# EAGLE board Esp32-S3mini_can_brd_NEW (EAGLE 9.7.0)
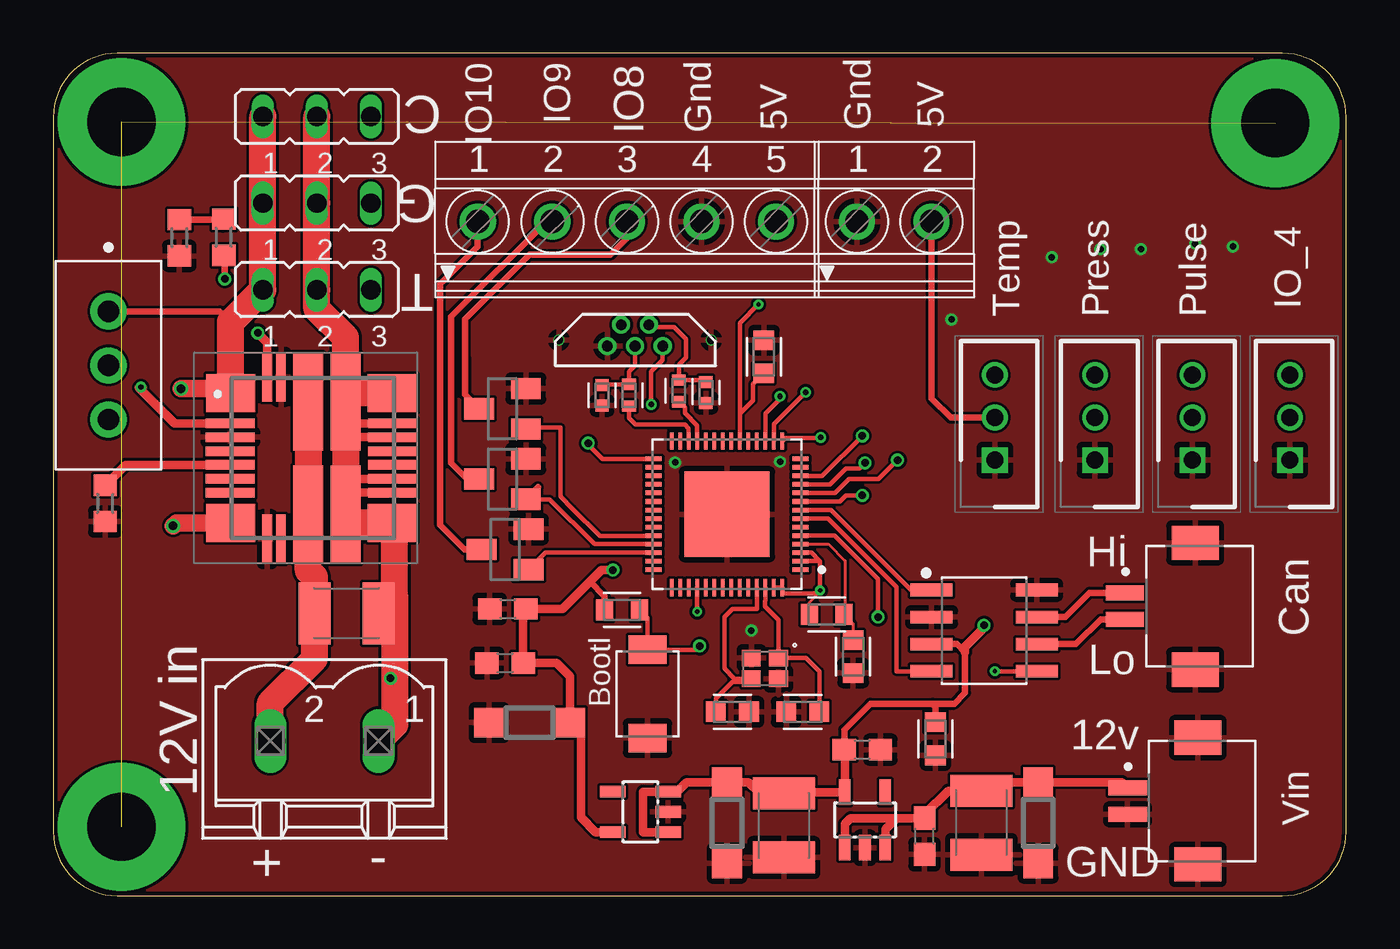
[diagram p0: board, top side]
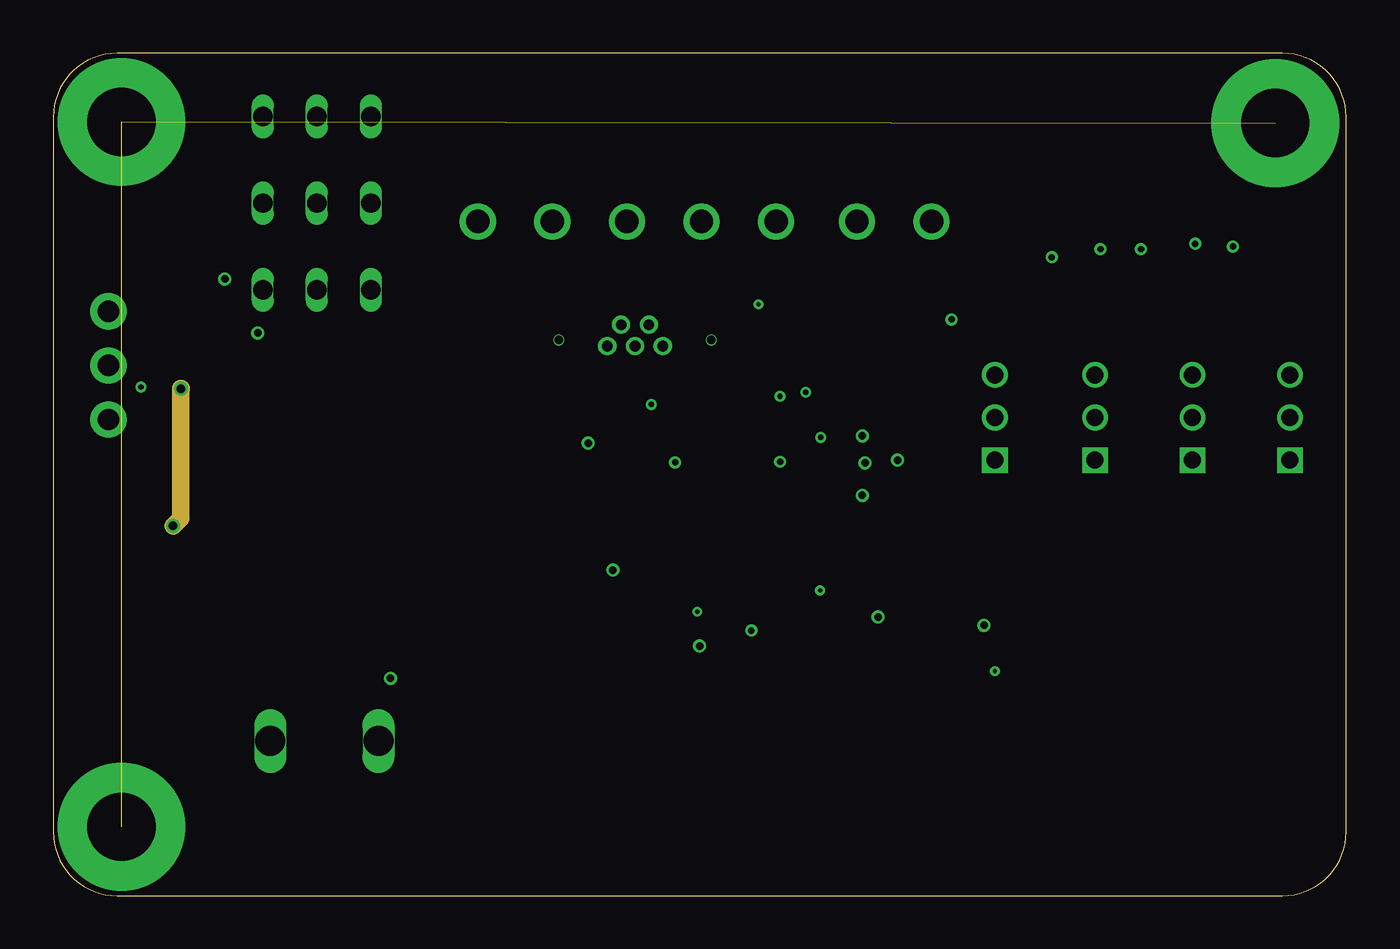
[diagram p1: board, inner layer Route2]
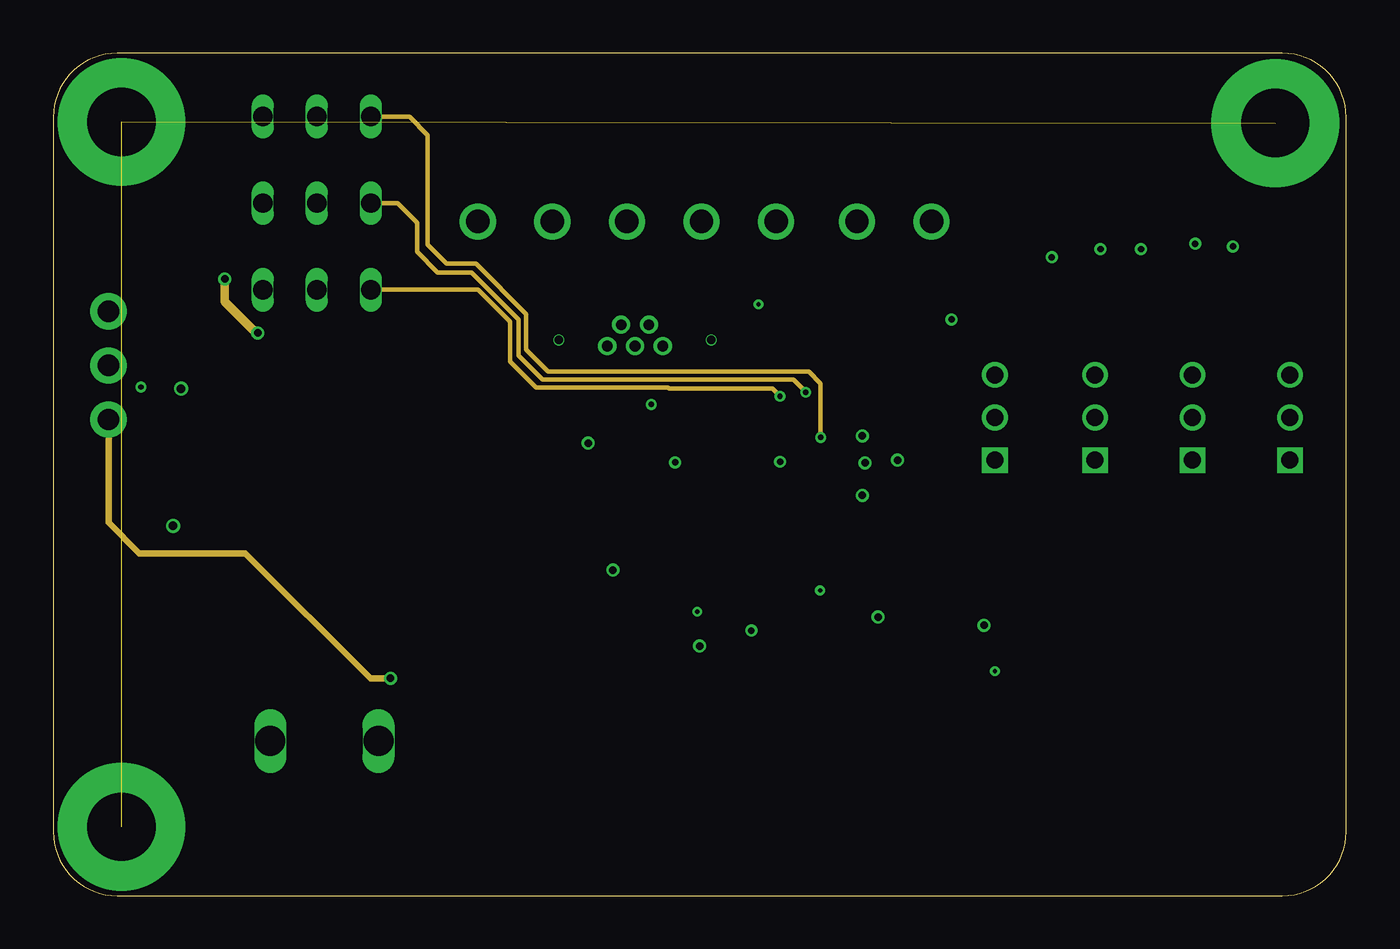
[diagram p2: board, inner layer Route15]
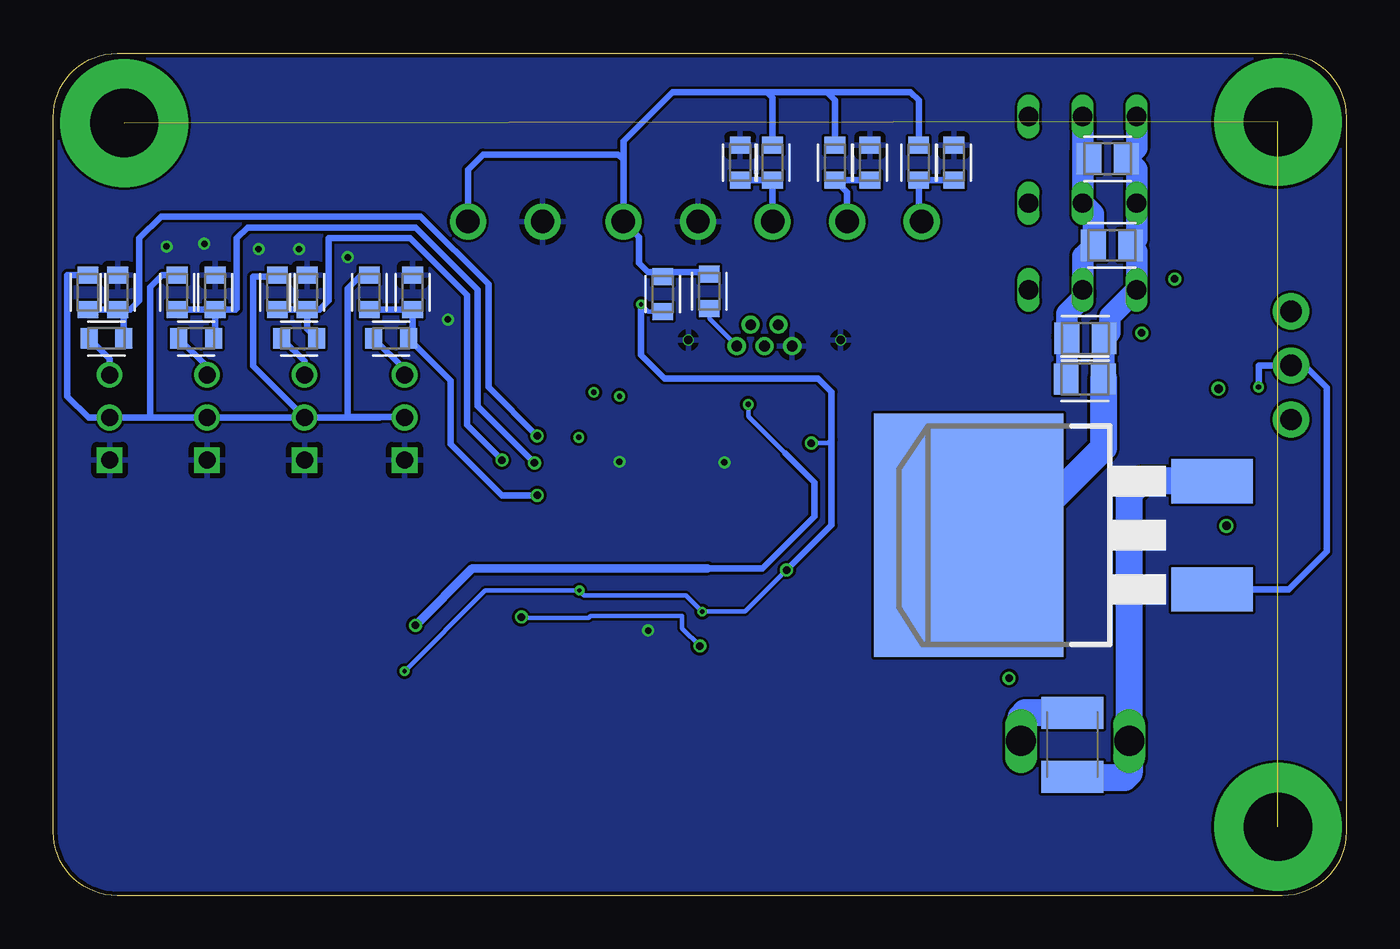
[diagram p3: board, bottom side, seen from below]

Size 60.69 x 39.55 mm. Coordinates in mm from the lower left corner, seen from the top.
Outline: 57.69,39.55 3,39.55 arc90 0,36.55 0,3 arc90 3,0 57.69,0 arc90 60.69,3 60.69,36.55 arc90 57.69,39.55
Copper layers (1+2*15+16): Top 0.035mm / dielectric 0.2mm / Route2 0.0175mm / dielectric 1.065mm / Route15 0.0175mm / dielectric 0.2mm / Bottom 0.035mm
Design rules "jlcpcb-4layers.dru *": minimum track width 3.5mil, minimum drill 0.2mm, track to track 5mil, track to pad 0.2mm, pad to pad 5mil, via to via 0.5mm, smd to smd 5mil, copper to edge 0.2mm, drill to drill 6mil, minimum pad ring 0.054mm, minimum via ring 0.13mm, stop-mask expansion 0.05mm, vias tented up to drill 16mil, thermal gap 10mil

## Footprints (pad centres in the part's own frame; a part is rotated, then mirrored left to right if it is on the bottom)
CAPC1608X85 = smd 0.921 x 0.97: 1 -0.775,0; 2 0.775,0
CAPC1005X60 = smd 0.56 x 0.629: 1 -0.485,0; 2 0.485,0
C0603 = smd 1.1 x 1: 1 -0.85,0; 2 0.85,0
CAPC2012X110 = smd 1.165 x 1.465: 1 -0.875,0; 2 0.875,0
C1210K = smd 1.5 x 2.9: 1 -1.5,0; 2 1.5,0
SOD123 = smd 1.4 x 1.4: A 1.9,0; C -1.9,0
TPSM84624MOLR = smd 2.3 x 1.8: 1 -3.8,3.05; 8 -3.8,-3.05; 13 3.8,-3.05; 20 3.8,3.05 | smd 2.3 x 0.45: 2 -3.808,1.625; 3 -3.808,0.975; 4 -3.808,0.325; 5 -3.808,-0.325; 6 -3.808,-0.975; 7 -3.808,-1.625; 14 3.808,-1.625; 15 3.808,-0.975; 16 3.808,-0.325; 17 3.808,0.325; 18 3.808,0.975; 19 3.808,1.625 | smd 0.45 x 2.3: 9 -2.075,-3.808; 10 -1.425,-3.808; 23 -1.425,3.808; 24 -2.075,3.808 | smd 1.4 x 4.6: 11 -0.15,-2.658; 12 1.6,-2.658; 21 1.6,2.658; 22 -0.15,2.658
SOIC127P599X175-8 = smd 1.967 x 0.599: 1 -2.469,1.905; 2 -2.469,0.635; 3 -2.469,-0.635; 4 -2.469,-1.905; 5 2.469,-1.905; 6 2.469,-0.635; 7 2.469,0.635; 8 2.469,1.905
D2PACK = smd 2.083 x 3.81: 1 -2.54,-8.89; 3 2.54,-8.89 | smd 11.43 x 8.89: 2 0,2.54
HRS_DF13A-2P-1.25H(51) = smd 0.7 x 1.8: 1 -0.625,-3.3; 2 0.625,-3.3 | smd 1.6 x 2.2: S1 -2.975,0; S2 2.975,0
SHDR3W60P0X200_1X3_780X360X680 = drill 0.8 pad 1.2 square: 1 0,0 | drill 0.8 pad 1.2: 2 -2,0; 3 -4,0
JP2 = drill 0.914 long: 1 -2.54,0; 2 0,0; 3 2.54,0
RESC1608X60 = smd 0.799 x 0.974: 1 -0.815,0; 2 0.815,0
SOT23 = smd 1 x 1.4: 1 -0.95,-1.1; 2 0.95,-1.1; 3 0,1.1
R0603 = smd 1 x 1.1: 1 -0.85,0; 2 0.85,0
PV36W = drill 1 pad 1.7: 1 0,0; 2 2.54,0; 3 5.08,0
RESC1005X40 = smd 0.535 x 0.644: 1 -0.507,0; 2 0.507,0
SOT23-5 = smd 0.55 x 1.2: 1 -0.95,-1.3; 2 0,-1.3; 3 0.95,-1.3; 4 0.95,1.3; 5 -0.95,1.3
SW_TS-1088-AR02016 = smd 1.35 x 1.8: 1 -2.075,0; 2 2.075,0
QFN40P700X700X90-57N = smd 0.81 x 0.22: 1 -3.445,2.6; 2 -3.445,2.2; 3 -3.445,1.8; 4 -3.445,1.4; 5 -3.445,1; 6 -3.445,0.6; 7 -3.445,0.2; 8 -3.445,-0.2; 9 -3.445,-0.6; 10 -3.445,-1; 11 -3.445,-1.4; 12 -3.445,-1.8; 13 -3.445,-2.2; 14 -3.445,-2.6; 29 3.445,-2.6; 30 3.445,-2.2; 31 3.445,-1.8; 32 3.445,-1.4; 33 3.445,-1; 34 3.445,-0.6; 35 3.445,-0.2; 36 3.445,0.2; 37 3.445,0.6; 38 3.445,1; 39 3.445,1.4; 40 3.445,1.8; 41 3.445,2.2; 42 3.445,2.6 | smd 0.22 x 0.81: 15 -2.6,-3.445; 16 -2.2,-3.445; 17 -1.8,-3.445; 18 -1.4,-3.445; 19 -1,-3.445; 20 -0.6,-3.445; 21 -0.2,-3.445; 22 0.2,-3.445; 23 0.6,-3.445; 24 1,-3.445; 25 1.4,-3.445; 26 1.8,-3.445; 27 2.2,-3.445; 28 2.6,-3.445; 43 2.6,3.445; 44 2.2,3.445; 45 1.8,3.445; 46 1.4,3.445; 47 1,3.445; 48 0.6,3.445; 49 0.2,3.445; 50 -0.2,3.445; 51 -0.6,3.445; 52 -1,3.445; 53 -1.4,3.445; 54 -1.8,3.445; 55 -2.2,3.445; 56 -2.6,3.445 | smd 4 x 4: 57 0,0
PCMB20AUETR = drill 0.5 pad 0.85: P$1 -1.3,0.28; P$2 -0.65,-0.72; P$3 0,0.28; P$4 0.65,-0.72; P$5 1.3,0.28 | drill 0.4 slot 1.1 rotated 90: SH@1 -3.575,0; SH@2 3.575,0
1751277 = drill 1.1 pad 1.7: 1 -7,-0.1; 2 -3.5,-0.1; 3 0,-0.1; 4 3.5,-0.1; 5 7,-0.1
1751248 = drill 1.1 pad 1.7: 1 -1.75,-0.1; 2 1.75,-0.1
MSTBV2 = drill 1.397 long: 1 -2.54,0; 2 2.54,0
WE-XTAL_IQXC-42 = smd 0.875 x 0.775: 1 -0.637,-0.487; 2 0.637,-0.487; 3 0.637,0.487; 4 -0.637,0.487

## Placement (x,y rotation side)
C1  [CAPC1608X85]  35.18,8.64 0 top
C2  [CAPC1608X85]  31.88,8.64 180 top
C3  [CAPC1608X85]  41.4,7.37 90 top
C4  [CAPC1608X85]  33.35,25.3 270 top
C5  [CAPC1005X60]  30.63,23.62 90 top
C5V_B  100n  [C0603]  37.97,6.86 180 top
C6  [CAPC1005X60]  25.76,23.5 90 top
C7  1µ  [CAPC1608X85]  37.54,11.23 270 top
C8  [CAPC2012X110]  11.2,34.59 0 bottom
C9  [CAPC2012X110]  12.27,24.26 0 bottom
C10  [CAPC2012X110]  12.24,26.16 0 bottom
C11  [CAPC2012X110]  11,30.53 0 bottom
C_5V_S  22u  [C1210K]  34.29,3.3 90 top
C_IN  22u  [C1210K]  43.56,3.43 90 top
C_IN1  22u  [C1210K]  13.77,13.26 180 top
C_IN2  22u  [C1210K]  12.85,7.09 270 bottom
C_IN_S  10n  [C0603]  40.89,2.79 90 top
C_IN_S1  10u  [C0603]  21.21,10.92 0 top
C_IN_S2  100n  [C0603]  21.34,13.46 0 top
D1  5.5v  [SOD123]  46.23,3.43 270 top
D2  16V  [SOD123]  31.62,3.43 270 top
D3  3.6v  [SOD123]  22.35,8.13 180 top
I2C  TPSM84824MOLR  [TPSM84624MOLR]  12.12,20.55 0 top
IC1  MCP2551  [SOIC127P599X175-8]  43.69,12.45 0 top
IC3  LM317BD2T  [D2PACK]  15.19,16.92 90 bottom
J1  DF13A-2P-1.25H(51)  [HRS_DF13A-2P-1.25H(51)]  53.59,13.59 270 top
J2  292161-3  [SHDR3W60P0X200_1X3_780X360X680]  44.2,20.45 270 top
J3  DF13A-2P-1.25H(51)  [HRS_DF13A-2P-1.25H(51)]  53.72,4.45 270 top
J4  292161-3  [SHDR3W60P0X200_1X3_780X360X680]  48.89,20.45 270 top
J5  292161-3  [SHDR3W60P0X200_1X3_780X360X680]  53.47,20.45 270 top
J6  292161-3  [SHDR3W60P0X200_1X3_780X360X680]  58.04,20.45 270 top
JP1  [JP2]  12.37,36.58 0 top
JP2  [JP2]  12.37,32.51 0 top
JP3  [JP2]  12.37,28.45 0 top
PD4  [RESC1608X60]  57.66,28.32 270 bottom
PD5  [RESC1608X60]  53.09,28.32 270 bottom
PD6  [RESC1608X60]  48.77,28.32 270 bottom
PD7  [RESC1608X60]  43.81,28.32 270 bottom
PU1  10k  [RESC1608X60]  36.3,13.21 180 top
PU2  10k  [RESC1608X60]  26.7,13.41 0 top
PU4  [RESC1608X60]  59.06,28.32 270 bottom
PU5  [RESC1608X60]  54.86,28.32 270 bottom
PU6  [RESC1608X60]  50.17,28.32 270 bottom
PU7  [RESC1608X60]  45.85,28.32 270 bottom
Q1  NMOSFET  [SOT23]  21.08,19.56 90 top
Q2  NMOSFET  [SOT23]  21.21,16.26 90 top
Q4  NMOSFET  [SOT23]  21.08,22.86 90 top
R1  [RESC1608X60]  29.9,28.37 90 bottom
R2  [RESC1608X60]  32.08,28.24 90 bottom
R3  [RESC1608X60]  28.45,34.42 270 bottom
R4  [RESC1608X60]  26.92,34.42 270 bottom
R5  [RESC1608X60]  22.35,34.42 270 bottom
R6  [RESC1608X60]  24,34.42 270 bottom
R7  [RESC1608X60]  18.41,34.42 270 bottom
R8  [RESC1608X60]  20.07,34.42 270 bottom
R9  [R0603]  8,30.91 270 top
R10  [R0603]  5.92,30.89 90 top
R11  [R0603]  2.44,18.41 90 top
R12  [PV36W]  2.59,27.43 270 top
R20  22  [RESC1005X40]  27.03,23.5 90 top
R21  22  [RESC1005X40]  29.36,23.7 90 top
R_3V3  3v3  [SOT23-5]  27.56,3.94 90 top
R_5V  5V  [SOT23-5]  38.1,3.56 0 top
RS4  [RESC1608X60]  58.19,26.16 180 bottom
RS5  [RESC1608X60]  53.97,26.16 180 bottom
RS6  [RESC1608X60]  49.15,26.16 180 bottom
RS7  [RESC1608X60]  44.83,26.16 180 bottom
S1  TS-1088-AR02016  [SW_TS-1088-AR02016]  27.89,9.47 270 top
U1  ESP32-S3R8  [QFN40P700X700X90-57N]  31.62,17.91 180 top
U$8  PCMB20AUETR  [PCMB20AUETR]  27.3,26.09 180 top
X1  1751277  [1751277]  26.92,31.75 0 top
X2  1751248  [1751248]  39.47,31.75 0 top
X3  MSTBV2  [MSTBV2]  12.73,7.26 180 top
Y1  40MHz  [WE-XTAL_IQXC-42]  33.4,10.67 180 top

## Library data of the parts
C1-C4 C7 = Capacitor; CATEGORY: Capacitor; PACKAGE_SIZE: 0603; PACKAGE_TYPE: Surface Mount; SUBCATEGORY: Ceramic Capacitors; TYPE: MLCC
C5 C6 = Capacitor; CATEGORY: Capacitor; PACKAGE_SIZE: 0402; PACKAGE_TYPE: Surface Mount; SUBCATEGORY: Ceramic Capacitors; TYPE: MLCC
C5V_B C_5V_S C_IN C_IN1 C_IN2 C_IN_S C_IN_S1 C_IN_S2 = rcl; SPICEPREFIX: C
C8-C11 = Capacitor; CATEGORY: Capacitor; PACKAGE_SIZE: 0805; PACKAGE_TYPE: Surface Mount; SUBCATEGORY: Ceramic Capacitors; TYPE: MLCC
D1-D3 = diode
I2C = TPSM84824MOLR; ARROW_PART_NUMBER: TPSM84824MOLR; ARROW_PRICE-STOCK: https://www.arrow.com/en/products/tpsm84824molr/texas-instruments?region=nac; DESCRIPTION: 4.5V to 17V Input, 0.6V-10V Output, 8A Power Module in Compact 7.5x7.5mm Footprint; HEIGHT: 5mm; MANUFACTURER_NAME: Texas Instruments; MANUFACTURER_PART_NUMBER: TPSM84824MOLR; MOUSER_PART_NUMBER: 595-TPSM84824MOLR; MOUSER_PRICE-STOCK: https://www.mouser.co.uk/ProductDetail/Texas-Instruments/TPSM84824MOLR?qs=W0yvOO0ixfEo%2FgpT5Em6eQ%3D%3D
IC1 = IC_Interface; CATEGORY: IC_Interface; MANUFACTURER: Microchip; MPN: MCP2551-E/SN; OPERATING_TEMP: -40 to +125 °C; PART_STATUS: Active; SUB-CATEGORY: Transceiver
IC3 = v-reg
J1 J3 = DF13A-2P-1.25H_51_; AVAILABILITY: In Stock; CHECK_PRICES: https://www.snapeda.com/parts/DF13A-2P-1.25H(51)/Hirose+Electric+Co+Ltd/view-part/?ref=eda; DESCRIPTION: Connector Header Surface Mount, Right Angle 2 position 0.049 (1.25mm); MF: Hirose Electric Co Ltd; MP: DF13A-2P-1.25H(51); PACKAGE: None; PRICE: None; PURCHASE-URL: https://www.snapeda.com/api/url_track_click_mouser/?unipart_id=4701063&manufacturer=Hirose Electric Co Ltd&part_name=DF13A-2P-1.25H(51)&search_term=None; SNAPEDA_LINK: https://www.snapeda.com/parts/DF13A-2P-1.25H(51)/Hirose+Electric+Co+Ltd/view-part/?ref=snap
J2 J4-J6 = TE 292161-3; ARROW_PART_NUMBER: 292161-3; ARROW_PRICE-STOCK: https://www.arrow.com/en/products/292161-3/te-connectivity?region=europe; DESCRIPTION: AMP - TE CONNECTIVITY - 292161-3 - HEADER, VERTICAL, 3WAY; HEIGHT: 6.8mm; MANUFACTURER_NAME: TE Connectivity; MANUFACTURER_PART_NUMBER: 292161-3; MOUSER_PART_NUMBER: 571-292161-3; MOUSER_PRICE-STOCK: https://www.mouser.co.uk/ProductDetail/TE-Connectivity/292161-3?qs=VKrXD49J9Epm0cTL0dEucA%3D%3D
JP1-JP3 = jumper
PD4-PD7 PU1 PU2 PU4-PU7 R1-R8 R20 R21 RS4-RS7 = Resistor; CATEGORY: Resistor; SUB-CATEGORY: Fixed
Q1 Q2 Q4 = Transistor; CATEGORY: Transistor; SUB-CATEGORY: MOSFET; TYPE: N-Channel
R9-R11 = MP930_res
R12 = Resistor; CATEGORY: Potentiometers; DATASHEET: https://www.bourns.com/docs/Product-Datasheets/pv36.pdf; DESCRIPTION: 0.5W 1/2W PC Pins Through Hole Trimmer Potentiometer Cermet 25.0 Turn Top Adjustment; MANUFACTURER: Bourns Inc.; MPN: PV36Wx; OPERATING_TEMPERATURE: -55°C ~ 125°C; PACKAGE_SIZE: NA; PACKAGE_TYPE: Through Hole; PART_STATUS: Active; ROHS: Compliant; SERIES: PV36; SUBCATEGORY: Trimmer Potentiometers; TEMPERATURE_COEFFICIENT: ±100ppm/°C; THERMALLOSS: 0.5 W; TOLERANCE: ±10%; TYPE: Top Adjustment Inline Leads
R_3V3 R_5V = v-reg-micrel; OC_FARNELL: unknown; OC_NEWARK: unknown
S1 = JLC PCB Basic Parts_loc; AVAILABILITY: Not in stock; CHECK_PRICES: https://www.snapeda.com/parts/TS-1088-AR02016/Xunpu/view-part/?ref=eda; DESCRIPTION: 50mA 4mm 100MΩ 100,000 Times 12V 160gf 3mm 2mm Round Button Vertical welding SPST SMD Tactile Switches ROHS; MF: Xunpu; MP: TS-1088-AR02016; PACKAGE: Package; PRICE: None; SNAPEDA_LINK: https://www.snapeda.com/parts/TS-1088-AR02016/Xunpu/view-part/?ref=snap
U1 = JLC PCB Basic Parts_loc; AVAILABILITY: In Stock; CHECK_PRICES: https://www.snapeda.com/parts/ESP32-S3R8/Espressif+Systems/view-part/?ref=eda; DESCRIPTION: IC RF TxRx + MCU Bluetooth, WiFi 802.11b/g/n, Bluetooth v5.0 2.412GHz ~ 2.484GHz 56-VFQFN Exposed Pad; MF: Espressif Systems; MP: ESP32-S3R8; PACKAGE: None; PRICE: None; SNAPEDA_LINK: https://www.snapeda.com/parts/ESP32-S3R8/Espressif+Systems/view-part/?ref=snap
U$8 = Library
X1 X2 = con-phoenix-350; OC_FARNELL: unknown; OC_NEWARK: unknown
X3 = Most_used_libr; MPN: MSTBV 2,5/2-GF-5.08; OC_FARNELL: 1792792; OC_NEWARK: 69R9845
Y1 = Wurth_Quartz Crystals &amp; Oscillators_WE-XTAL; C-LOAD: 10pF; DATASHEET-URL: https://www.we-online.com/catalog/datasheet/830059585.pdf; MOUNT: SMT; PART-NUMBER: 830059585; STABILITY: 20ppm; TOLERANCE: ±15ppm

## Nets
5_3V: J2.2 J4.2 J5.2 J6.2 PU4.1 PU5.1 PU6.1 PU7.1 R1.2 R2.2 R4.1 R6.1 R8.1 X1.5 X2.2
+3V3: C4.2 C_IN_S1.2 C_IN_S2.2 D3.C IC1.5 PU1.2 PU2.1 R2.1 R_3V3.5 U1.2 U1.3 U1.20 U1.29 U1.46 U1.55 U1.56
+5V: C3.2 C5V_B.2 C_5V_S.2 D2.C IC1.3 R1.1 R_3V3.1 R_3V3.3 R_5V.5 U$8.P$1
+7V: C8.2 C9.2 C10.2 C11.2 I2C.1 I2C.8 IC3.2 JP1.1 JP2.1 JP3.1 R12.1
+12V: C_IN1.2 C_IN2.2 I2C.11 I2C.22 IC3.3 X3.2
BLUE: Q1.3 R5.2 R6.2 X1.2
BOOT: PU2.2 S1.1 U1.5
CAN_HI: IC1.7 J1.1
CAN_LO: IC1.6 J1.2
CHOKE: JP3.3 U1.17
DGND: C8.1 C9.1 C10.1 C11.1 C_IN1.1 C_IN2.1 I2C.12 I2C.13 I2C.14 I2C.15 I2C.18 I2C.19 I2C.20 I2C.21 JP1.2 JP2.2 JP3.2 R12.3 X3.1
DRV_B: Q1.1 U1.39
DRV_G: Q4.1 U1.38
DRV_R: Q2.1 U1.40
GEAR: JP2.3 U1.16
GND: C1.1 C2.1 C3.1 C4.1 C5.1 C5V_B.1 C6.1 C7.2 C_5V_S.1 C_IN.1 C_IN_S1.1 C_IN_S2.1 C_IN_S.1 D1.A D2.A D3.A I2C.3 I2C.9 I2C.23 IC1.2 IC1.8 J1.S1 J1.S2 J2.1 J3.2 J3.S1 J3.S2 J4.1 J5.1 J6.1 PD4.1 PD5.1 PD6.1 PD7.1 Q1.2 Q2.2 Q4.2 R3.1 R5.1 R7.1 R10.1 R11.1 R_3V3.2 R_5V.2 S1.2 U1.57 U$8.P$5 U$8.SH@1 U$8.SH@2 X1.4 X2.1 Y1.2 Y1.4
GREEN: Q4.3 R3.2 R4.2 X1.3
IO4: PD4.2 PU4.2 RS4.1 U1.12
IO5: PD5.2 PU5.2 RS5.1 U1.11
IO6: PD6.2 PU6.2 RS6.1 U1.10
IO7: PD7.2 PU7.2 RS7.1 U1.9
N$3: C1.2 U1.54 Y1.1
N$4: C2.2 U1.53 Y1.3
N$6: I2C.24 R9.2
N$7: C7.1 PU1.1 U1.4
N$8: J6.3 RS4.2
N$9: R9.1 R10.2
N$10: C6.2 R20.2 U$8.P$3
N$11: C5.2 R21.2 U$8.P$2
N$12: J4.3 RS6.2
N$13: J5.3 RS5.2
N$14: J2.3 RS7.2
N$15: I2C.2 IC3.1 R12.2
N$16: I2C.5 R11.2
RED: Q2.3 R7.2 R8.2 X1.1
RXD: IC1.4 U1.7
THROTTLE: JP1.3 U1.15
TXD: IC1.1 U1.8
USB_D+: R20.1 U1.26
USB_D-: R21.1 U1.25
VIN: C_IN.2 C_IN_S.2 D1.C J3.1 R_5V.1 R_5V.3

## Tracks (layer width: path | path; a pad name or v marks a point on that pad's centre or on a via)
5_3V
  Top 0.305: X2.2 41.22,23.34 42.12,22.45 J2.2
  Bottom 0.203: R2.2 31.93,29.21 31.93,29.26
  Bottom 0.305: 33.92,34.54 X1.5 33.2,30.92 33.2,29.7 32.77,29.26 31.93,29.26 29.97,29.26 R1.2 | 33.92,34.54 33.92,35.42 31.62,37.72 27.18,37.72 | 27.18,37.72 26.92,37.47 R4.1 | 27.18,37.72 24.38,37.72 | 24.38,37.72 24,37.34 R6.1 | 24.38,37.72 20.45,37.72 20.07,37.34 R8.1 | X2.2 41.22,34.09 40.51,34.8 34.18,34.8 33.92,34.54 | J4.2 51.31,24.86 51.31,29.06 50.24,29.06 PU6.1 | PU5.1 55.57,29.14 56.13,28.57 56.13,22.48 56.1,22.45 | PU4.1 60.02,29.14 60.02,23.44 59.02,22.45 J6.2 56.1,22.45 | J2.2 44.23,22.48 45.94,22.48 45.97,22.45 | PU7.1 46.23,29.14 46.86,28.5 46.86,22.48 45.34,22.48 45.37,22.45 45.97,22.45 | J4.2 45.97,22.45 | J4.2 J5.2 56.1,22.45
+3V3  (via drill 0.2, 0.35)
  Top 0.152: PU1.2 35.48,13.76 35.99,14.28
  Top 0.2: 32.22,21.43 U1.20 32.22,22.63 | U1.46 v30.22,13.34 v30.23,13.34 | U1.55 U1.56 34.22,14.2 35.92,14.2 35.99,14.28 v35.99,14.33 35.99,15.7 35.97,15.72 | 35.97,15.72 35.08,15.72 U1.2 | U1.3 35.58,16.11 35.97,15.72 | v44.2,10.54 IC1.5 | 32.22,22.63 32.22,26.89 v33.1,27.76 | C4.2 32.84,24.02 32.84,23.25 32.22,22.63
  Top 0.203: U1.29 25.77,20.51 25.07,21.21 v25.11,21.25
  Top 0.305: PU2.1 25.88,14.05 25.18,14.74
  Top 0.406: R_3V3.5 25.46,2.99 24.77,3.68 24.77,7.62 D3.C 24.25,10.29 23.62,10.92 C_IN_S1.2 22.06,13.34 C_IN_S2.2 23.9,13.46 25.18,14.74 25.73,15.29 v26.26,15.29
  Bottom 0.2: v26.26,15.29 28.22,13.34 v30.23,13.34 30.99,14.1 35.76,14.1 v35.99,14.33 40.41,14.33 v44.2,10.54
  Bottom 0.203: v25.11,21.25 24.32,21.25 24.16,21.41 | R2.1 32.76,27.43 v33.1,27.76
  Bottom 0.305: v26.26,15.29 24.16,17.4 24.16,21.41 24.16,23.65 24.79,24.28 32,24.28 33.1,25.38 v33.1,27.76
+5V  (via drill 0.25, 0.35)
  Top 0.203: v28.07,23.06 28.07,24.61 28.61,25.15 U$8.P$1
  Top 0.305: C5V_B.2 37.12,7.79 38.35,9.02 41.27,9.02 | 41.27,9.02 42.29,9.02 42.8,9.53 42.8,11.43 42.42,11.81 IC1.3 | C3.2 41.4,8.89 41.27,9.02
  Top 0.406: C5V_B.2 37.15,6.83 R_5V.5 34.34,4.86 C_5V_S.2 33.17,4.8 32.64,5.33 D2.C 29.71,5.33 29.27,4.89 R_3V3.3 27.69,4.89 27.69,2.99 R_3V3.1 | 42.8,11.43 42.8,11.68 43.69,12.57 v43.69,12.7
  Bottom 0.203: 26.31,20.75 28.07,22.5 v28.07,23.06 | R1.1 29.9,27.1 U$8.P$1
  Bottom 0.305: 29.97,15.37 27.41,15.37 24.97,17.8 24.97,19.41 26.31,20.75
  Bottom 0.406: v43.69,12.7 41.02,15.37 29.97,15.37
+7V  (via drill 0.4)
  Top 0.305: R12.1 7.82,27.43 8.32,26.93
  Top 0.813: I2C.8 5.79,17.5 5.64,17.35 v5.63,17.36 | v5.99,23.8 8.12,23.8 I2C.1
  Top 1.27: I2C.1 8.32,26.93 JP3.1 JP1.1
  Route2 0.813: v5.63,17.36 5.97,17.7 5.97,23.8 v5.99,23.8
  Bottom 1.016: C9.2 11.37,24.28 C10.2 11.09,26.44 11.09,27.19 JP3.1 9.83,30.24 C11.2 9.83,30.82 JP2.1 9.83,34.1 C8.2 9.83,35.09 JP1.1
  Bottom 1.27: C9.2 11.39,21.02 14.3,18.11 16.54,18.11 IC3.2
+12V
  Top 1.27: I2C.22 I2C.11 11.97,15.27 12.27,14.97 C_IN1.2 12.27,11.12 10.18,9.04 X3.2
  Bottom 1.27: C_IN2.2 12.8,5.54 10.41,5.54 10.18,5.77 X3.2 10.18,18.87 9.58,19.48 6.32,19.48 IC3.3
BLUE
  Top 0.305: X1.2 23.14,31.65 18.67,27.18 18.67,20.32 19.43,19.56 Q1.3
  Bottom 0.305: R5.2 R6.2 23.42,33.02 X1.2
BOOT  (via drill 0.35)
  Top 0.203: v30.34,11.72 30.3,11.76 30.09,11.55 S1.1 27.89,13.03 PU2.2 | v38.71,13.08 38.71,14.86 36.66,16.91 U1.5
  Bottom 0.203: v30.34,11.72 31.17,12.55 31.17,13.13 35.46,13.13 35.56,13.03 38.71,13.03 v38.71,13.08
CAN_HI
  Top 0.305: J1.1 48.63,14.21 47.5,13.08 IC1.7
CAN_LO
  Top 0.305: IC1.6 48.01,11.81 49.16,12.96 J1.2
CHOKE  (via drill 0.25)
  Top 0.203: U1.17 33.42,22.63 34.11,23.32 v34.11,23.44
  Route15 0.203: v34.11,23.44 33.76,23.8 28.91,23.8 28.85,23.85 22.66,23.85 21.44,25.07 21.44,26.95 19.94,28.45 JP3.3
DGND  (via drill 0.35)
  Top 0.406: I2C.19 13.72,22.17 | 13.72,22.17 | I2C.18 13.73,21.52 13.72,21.51 | I2C.15 13.86,19.57 13.72,19.43 14.22,18.92 I2C.14 | 16.03,17.39 16.03,10.41 v15.82,10.21
  Top 1.27: I2C.21 13.72,26.21 12.37,27.56 JP3.2 JP2.2 JP1.2 | I2C.21 13.72,22.17 13.72,21.51 13.72,19.43 I2C.12 14.11,17.5 I2C.13 16.03,17.39 16.03,14.02 | I2C.20 14.11,23.6 I2C.21 | 16.03,14.02 16.03,8.03 X3.1 | C_IN1.1 16.03,14.02
  Route15 0.305: v15.82,10.21 14.88,10.21 9.02,16.08 4.04,16.08 2.59,17.53 R12.3
  Bottom 1.016: 13.21,26.25 C10.1 | C10.1 13.12,27.32 12.37,28.07 JP3.2 12.37,30.04 C11.1 11.87,32.02 JP2.2 12.37,34.89 | C10.1 13.12,24.28 C9.1 | JP1.2 12.37,34.89 | 12.37,34.89 C8.1
  Bottom 1.27: C_IN2.1 15.06,8.59 15.27,8.38 X3.1
DRV_B
  Top 0.203: U1.39 26.55,16.51 26.54,16.51 25.4,16.51 23.3,18.61 Q1.1
  Top 0.305: Q1.1 22.75,19.18
DRV_G
  Top 0.2: 24.38,18.16 23.8,18.75 23.8,21.97 22.24,21.97 Q4.1
  Top 0.203: 24.38,18.16 25.65,16.89 28.16,16.89 U1.38
DRV_R
  Top 0.203: U1.40 23.11,16.11 Q2.1
GEAR  (via drill 0.25)
  Top 0.203: v35.32,23.64 33.82,22.14 U1.16
  Route15 0.203: JP2.3 16.15,32.51 17.07,31.6 17.07,30.23 18.03,29.26 19.63,29.26 21.84,27.05 21.84,25.35 22.96,24.23 34.75,24.23 35.33,23.65 v35.32,23.64
GND  (via drill 0.3)
  Top 0.305: U1.57 31.65,17.91
  other vias: 55.37,30.48 51.05,30.35 46.86,29.97 42.16,27.05 53.59,30.61 49.15,30.35 32.77,12.45 34.11,20.37 29.18,20.35
  pour Top: -0.28,0.15 57.76,0.15 58.17,0.18 58.56,0.27 58.95,0.41 59.3,0.6 59.63,0.85 59.91,1.14 60.16,1.46 60.35,1.82 60.49,2.2 60.58,2.59 60.61,3 60.61,36.29 60.58,36.75 60.48,37.2 60.32,37.64 60.1,38.04 59.82,38.41 59.5,38.73 59.13,39.01 58.72,39.23 58.29,39.39 57.84,39.49 57.38,39.52 -0.28,39.52
  pour Bottom: -0.41,0.15 57.76,0.15 58.17,0.18 58.56,0.27 58.95,0.41 59.3,0.6 59.63,0.85 59.91,1.14 60.16,1.46 60.35,1.82 60.49,2.2 60.58,2.59 60.61,3 60.61,36.55 60.58,36.97 60.49,37.39 60.34,37.79 60.13,38.17 59.88,38.51 59.57,38.82 59.23,39.07 58.86,39.28 58.45,39.43 58.04,39.52 57.61,39.55 -0.41,39.55
GREEN
  Top 0.305: Q4.3 19.32,23.52 19.32,25.15 19.32,25.29 19.32,27.07 22.35,30.1 26.16,30.1 26.92,30.86 X1.3
  Bottom 0.305: R3.2 R4.2 X1.3
IO4  (via drill 0.35)
  Top 0.203: v37.97,21.59 36.09,19.71 U1.12
  Bottom 0.305: PD4.2 57.38,27.22 RS4.1 | PD4.2 PU4.2 | PD4.2 57.08,27.51 56.64,27.94 56.64,30.86 55.63,31.88 43.43,31.88 40.26,28.7 40.26,23.88 v37.97,21.59
IO5  (via drill 0.35)
  Top 0.2: v38.1,20.32 37.85,20.07 37.21,20.07 36.45,19.3 U1.11
  Bottom 0.305: RS5.1 53.09,26.24 PD5.2 | PD5.2 PU5.2 | PD5.2 52.12,27.51 52.07,27.56 52.07,30.86 51.56,31.37 43.69,31.37 40.77,28.45 40.77,22.99 v38.1,20.32
IO6  (via drill 0.35)
  Top 0.203: v39.62,20.45 38.73,19.56 37.34,19.56 36.69,18.91 U1.10
  Bottom 0.305: PD6.2 48.77,26.6 RS6.1 | PD6.2 PU6.2 | PD6.2 48.19,27.51 47.75,27.94 47.75,30.86 43.94,30.86 41.27,28.19 41.27,22.1 v39.62,20.45
IO7  (via drill 0.35)
  Top 0.203: v37.97,18.8 37.21,18.8 36.92,18.51 U1.9
  Bottom 0.305: PU7.2 PD7.2 43.81,26.36 RS7.1 42.04,24.18 42.04,21.21 39.62,18.8 v37.97,18.8
N$1  (via drill 3.2 pad 6)  (2 unrouted)
  other vias: 3.2,3.23 57.36,36.27 3.2,36.32
N$3
  Top 0.203: U1.54 33.42,13.87 33.4,13.84 33.4,13.59 34.04,12.95 Y1.1 35.33,11.15 35.95,10.53 C1.2
N$4
  Top 0.203: C2.2 31.1,9.26 31.88,10.03 32.62,10.03 Y1.3 31.98,10.18 31.5,10.67 31.5,13.08 31.88,13.46 33.02,13.46 U1.53
N$6  (via drill 0.35)
  Top 0.305: v8.05,28.96 8.05,30.01 R9.2
  Top 0.406: I2C.24 10.04,25.98 v9.6,26.42
  Route15 0.406: v9.6,26.42 9.53,26.42 8.05,27.89 v8.05,28.96
N$7
  Top 0.152: U1.4 36.38,16.51 37.16,15.72 37.16,13.26 PU1.1 37.54,12.78 C7.1
N$8
  Bottom 0.305: J6.3 58.04,25.19 RS4.2
N$9
  Top 0.305: 7.96,31.4 R9.1 7.98,31.74 R10.2
N$10
  Top 0.2: U$8.P$3 27.3,24.89 27.03,24.61 R20.2
  Top 0.203: C6.2 25.78,24 R20.2
N$11
  Top 0.2: 29.69,26.14 29.69,25.27 29.36,24.94 R21.2 30.53,24.21 C5.2
  Top 0.203: U$8.P$2 28.06,26.7 29.06,26.7 29.13,26.7 29.69,26.14
N$12
  Bottom 0.305: J4.3 48.89,25.09 RS6.2
N$13
  Bottom 0.305: J5.3 53.47,24.84 RS5.2
N$14
  Bottom 0.305: J2.3 44.2,24.71 RS7.2
N$15  (via drill 0.25)
  Top 0.406: I2C.2 5.69,22.17 4.01,23.85 4.19,23.85 4.17,23.88 v4.11,23.88
  Bottom 0.305: 2.62,24.92 R12.2 | R12.2 4.11,24.89 v4.11,23.88 | IC3.1 2.69,14.38 0.91,16.15 0.91,23.85 1.96,24.89 R12.2
N$16
  Top 0.406: I2C.5 3.4,20.22 R11.2
RED
  Top 0.305: Q2.3 19.3,16.26 18.16,17.4 18.16,28.7 19.92,30.46 X1.1
  Bottom 0.305: R7.2 R8.2 20.07,31.79 X1.1
RXD
  Top 0.203: U1.7 36.36,17.71 39.57,14.5 39.57,10.54 IC1.4
THROTTLE  (via drill 0.25)
  Top 0.203: U1.15 34.36,21.49 36.02,21.49 v36.02,21.51
  Route15 0.203: v36.02,21.51 36.02,24.05 35.46,24.61 23.22,24.61 22.2,25.63 22.2,27.3 19.84,29.67 18.47,29.67 17.58,30.56 17.58,35.71 16.71,36.58 JP1.3
TXD
  Top 0.203: U1.8 36.5,18.11 40.26,14.35 IC1.1
USB_D+
  Top 0.2: R20.1 27.03,22.43 27.33,22.12 29.64,22.12 29.82,21.94 U1.26
USB_D-
  Top 0.2: R21.1 29.64,22.91 29.64,22.66 30.22,22.08 U1.25
VIN
  Top 0.406: J3.1 50.16,5.33 D1.C 43.96,5.33 C_IN.2 42.01,4.93 40.89,3.81 C_IN_S.2 39.59,3.64 | R_5V.3 39.05,3.11 39.59,3.64 | R_5V.1 37.15,3.37 37.43,3.64 39.59,3.64

## Text on the board
tPlace: C | G | T | IO_4 | Temp | Press | Pulse | Bootl | 12V in | - | Vin | +
tNames: IO10 | IO9 | IO8 | Gnd | 5V | Gnd | 5V | Hi | Lo | Can | 12v | GND